# Altium PCB _Mainboard 1.1.PcbDoc (part 1 of 2)
Units mm, origin at the board's own origin, x right, y up, seen from the top; angles counter-clockwise.
Board outline 140.34 x 91.44 mm, 2 copper layers (Top Layer, Bottom Layer); 105 components, 51 nets, 343 pads, 208 vias.
Unrouted connection lines stored in the file: 1.
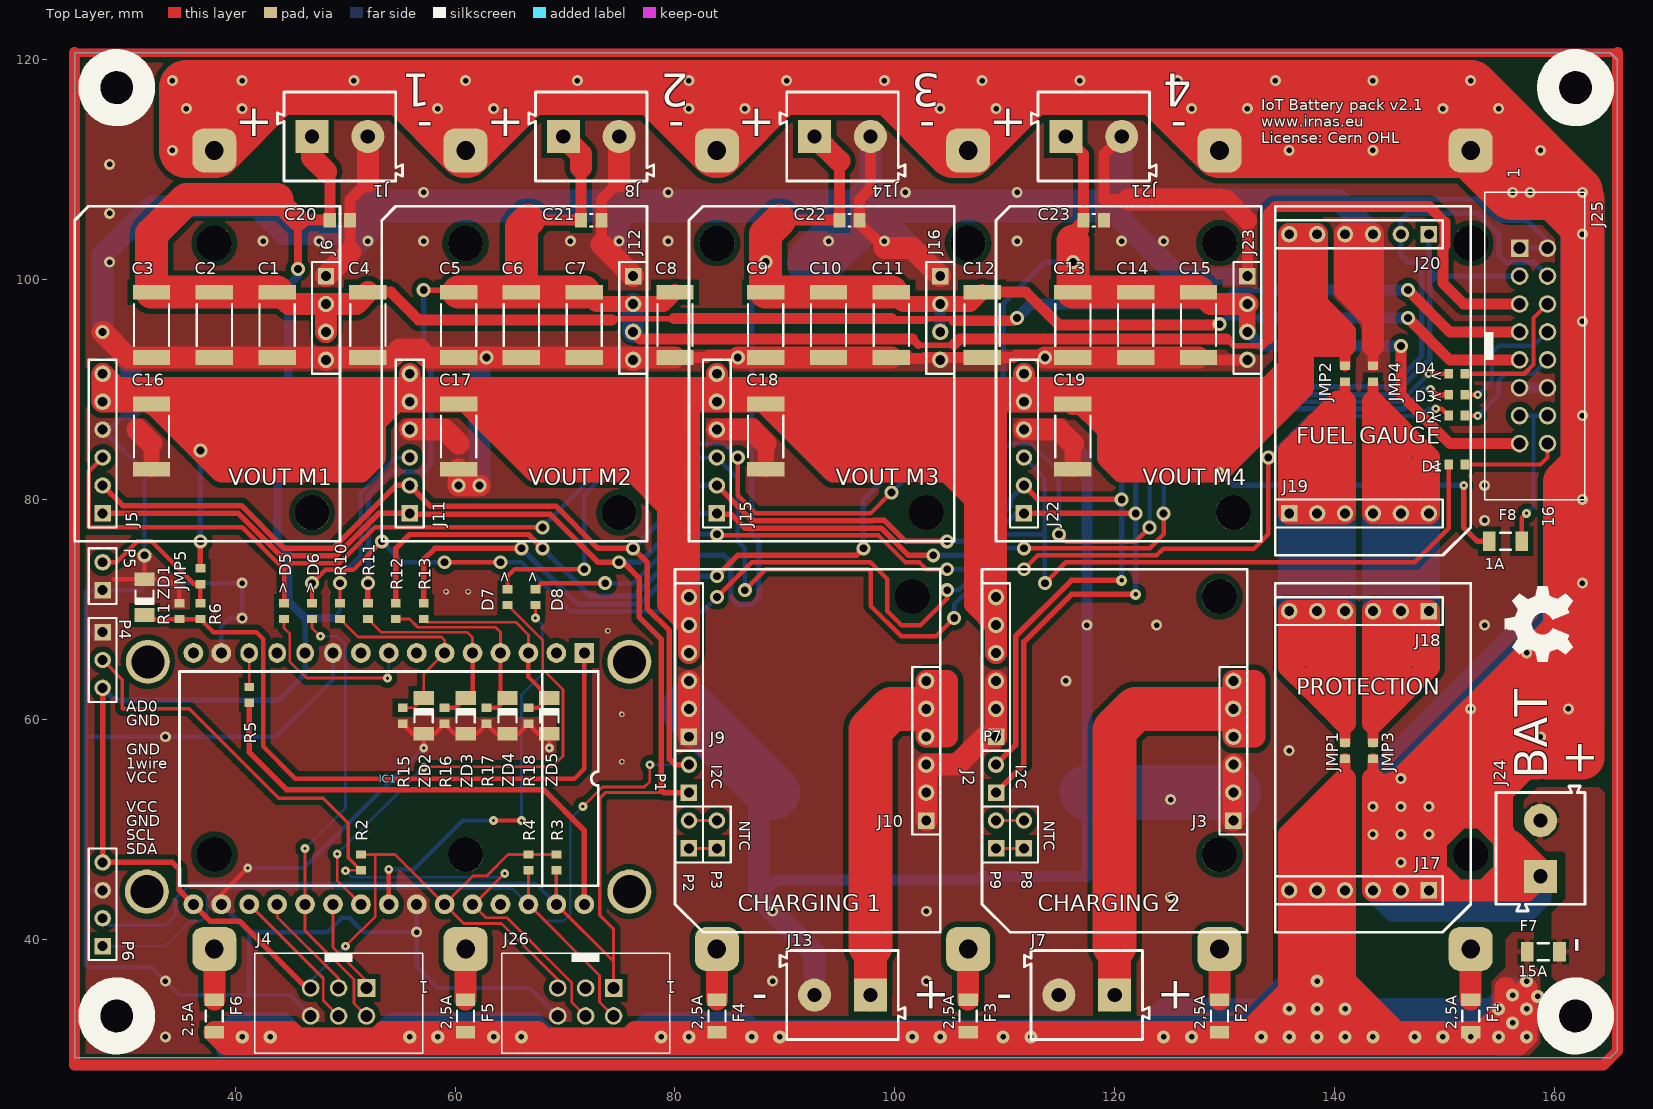
[diagram p0: Top Layer view]
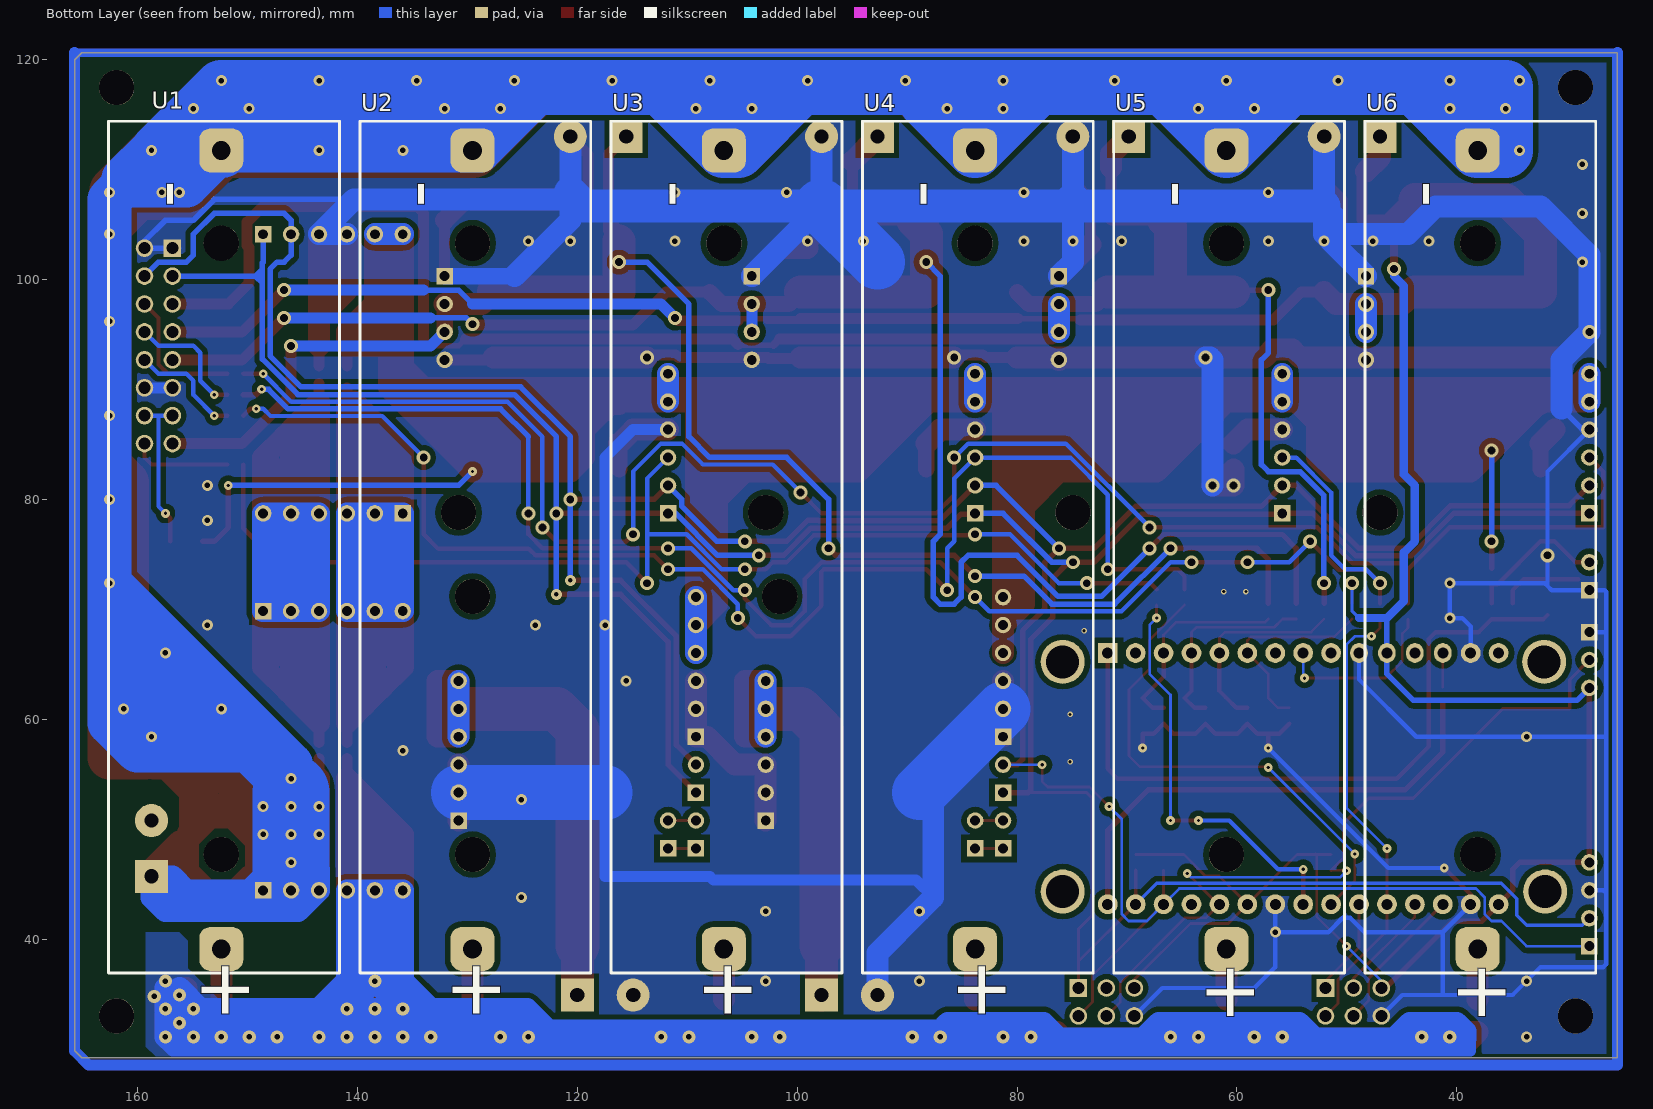
[diagram p1: Bottom Layer view, seen from below]
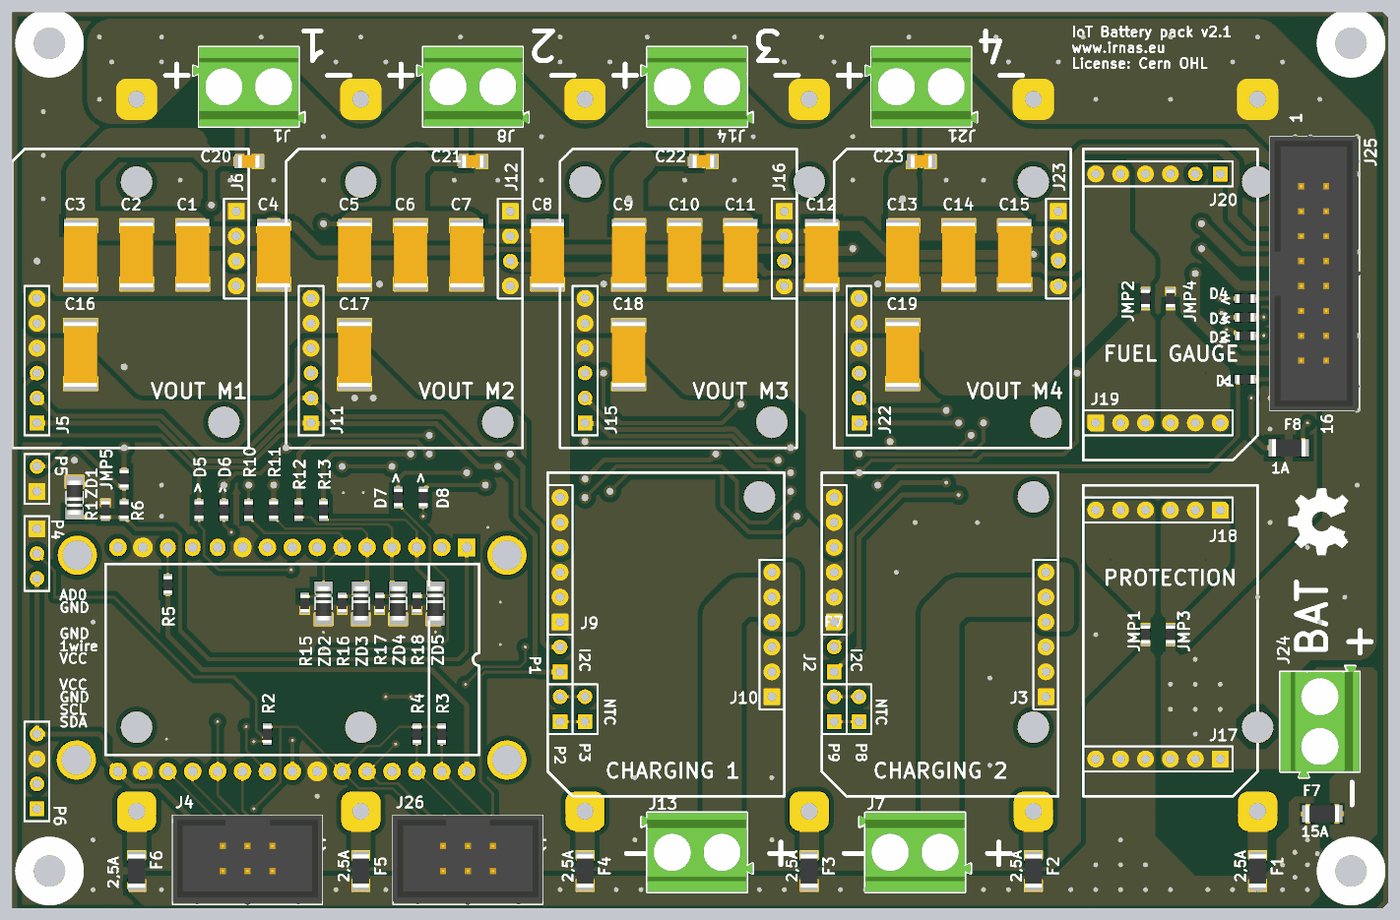
[diagram p3: 3D render of the assembled board from above, using the file's embedded part models]

## Layer stack, top to bottom
Top Solder: solder mask 0.0102, Solder Resist, Dk 3.5
Top Layer: signal copper 0.0356
Dielectric 1: dielectric 0.32, FR-4, Dk 4.8
Bottom Layer: signal copper 0.0356
Bottom Solder: solder mask 0.0102, Solder Resist, Dk 3.5

## Board outline
25.4,29.21 25.4,120.65 165.1,120.65 165.735,120.015 165.735,29.845 165.1,29.21

## Design rules (kind name [scope] priority, off if disabled: settings)
Clearance Clearance_polygon [InNamedPolygon('GND')] p1: gap=0.5 ignorepadtopadclearanceinfootprint=FALSE
Clearance [All] p2: gap=0.2 ignorepadtopadclearanceinfootprint=FALSE
ComponentClearance [All] p1 off: gap=0.254 collisioncheckmode=3 verticalgap=0.254 showdistances=FALSE
Height [All] p1: minheight=0 maxheight=30 prefheight=0
HoleSize [All] p1: absolutevalues=TRUE maxlimit=5 minlimit=0.025 maxpercent=80.000 minpercent=20.000
PlaneConnect [All] p1: planeconnectstyle=Relief reliefexpansion=0.508 reliefentries=4 reliefconductorwidth=0.5 reliefairgap=0.254
PolygonConnect PolygonConnect_gnd [InNet('GND')] p1: connectstyle=Direct reliefconductorwidth=0.5 reliefentries=4 polygonreliefangle="90 Angle" airgapwidth=0.254
PolygonConnect [All] p2: thpad.connectstyle=Relief thpad.reliefconductorwidth=0.5 thpad.reliefentries=4 thpad.polygonreliefangle="90 Angle" thpad.airgapwidth=0.254 smdpad.connectstyle=Relief smdpad.reliefconductorwidth=0.5 smdpad.reliefentries=4 smdpad.polygonreliefangle="90 Angle" smdpad.airgapwidth=0.254 via.connectstyle=Direct via.reliefconductorwidth=0.254 via.reliefentries=4 via.polygonreliefangle="90 Angle" via.airgapwidth=0.254
RoutingVias [All] p1: holewidth=0.4 width=0.8 viastyle="Through Hole" minholewidth=0.3 minwidth=0.6 maxholewidth=1.5 maxwidth=3
SilkToSilkClearance [All] p1 off: silktosilkclearance=0.254
SilkToSolderMaskClearance [IsPad] p1: minsilkscreentomaskgap=0.1 clearancetoexposedcopper=TRUE
SolderMaskExpansion [All] p1: expansion=0.102
Width [All] p1: maxlimit=10 minlimit=0.2 preferedwidth=0.3 minimp=50.000000 maximp=50.000000 favimp=50.000000
24 further rules are at their usual default settings.

## Classes and differential pairs
component class NodemcuShield_Light_Temp_LCD: D5 D6 D7 D8 IC1 J4 J26 JMP5 P4 P5 P6 R1 R2 R3 R4 R5 R6 R7 R8 R9 R10 R11 R12 R13 R14 R15 R16 R17 R18 ZD1 ZD2 ZD3 ZD4 ZD5
component class _Mainboard: D1 D2 D3 D4 F1 F2 F3 F4 F5 F6 F7 F8 F? J1 J2 J3 J5 J6 J7 J8 J9 J10 J11 J12 J13 J14 J15 J16 J17 J18 J19 J20 J21 J22 J23 J24 J25 JMP1 JMP2 JMP3 JMP4 JMP? P1 P2 P3 P7 P8 P9 U1 U2 U3 U4 U5 U6
component class Main_capacitors: C1 C2 C3 C4 C5 C6 C7 C8 C9 C10 C11 C12 C13 C14 C15 C16 C17 C18 C19 C20 C21 C22 C23 C?

## Components (designator, comment, footprint, x,y, rotation, side; value= is the part's Value field where it differs from the comment)
C1 "" "2512 CAP" 43.815,95.885 r90 top
C2 "" "2512 CAP" 38.1,95.885 r90 top
C3 "" "2512 CAP" 32.385,95.885 r90 top
C4 "" "2512 CAP" 52.07,95.885 r90 top
C5 "" "2512 CAP" 60.325,95.885 r90 top
C6 "" "2512 CAP" 66.04,95.885 r90 top
C7 "" "2512 CAP" 71.755,95.885 r90 top
C8 "" "2512 CAP" 80.01,95.885 r90 top
C9 "" "2512 CAP" 88.265,95.885 r90 top
C10 "" "2512 CAP" 93.98,95.885 r90 top
C11 "" "2512 CAP" 99.695,95.885 r90 top
C12 "" "2512 CAP" 107.95,95.885 r90 top
C13 "Capacitor" "2512 CAP" 116.205,95.885 r90 top
C14 "Capacitor" "2512 CAP" 121.92,95.885 r90 top
C15 "Capacitor" "2512 CAP" 127.635,95.885 r90 top
C16 "" "2512 CAP" 32.385,85.725 r90 top
C17 "" "2512 CAP" 60.325,85.725 r90 top
C18 "" "2512 CAP" 88.265,85.725 r90 top
C19 "" "2512 CAP" 116.205,85.725 r90 top
C20 "" "0805 CAP" 49.53,105.41 r180 top
C21 "" "0805 CAP" 72.39,105.41 r180 top
C22 "" "0805 CAP" 95.885,105.41 r180 top
C23 "Capacitor" "0805 CAP" 118.11,105.41 r180 top
D1 "Schottky SOD523" "0603 RES" 151.13,83.185 r180 top
D2 "Schottky SOD523" "0603 RES" 151.13,87.63 r180 top
D3 "Schottky SOD523" "0603 RES" 151.13,89.535 r180 top
D4 "Schottky SOD523" "0603 RES" 151.13,91.44 r180 top
D5 "Schottky SOD523" "0603 RES" 44.45,69.85 r270 top
D6 "Schottky SOD523" "0603 RES" 46.99,69.85 r270 top
D7 "Schottky SOD523" "0603 RES" 64.77,71.12 r270 top
D8 "Schottky SOD523" "0603 RES" 67.31,71.12 r270 top
F1 "SMD fuse" "1206 RES" 152.4,33.02 r90 top
F2 "SMD fuse" "1206 RES" 129.54,33.02 r90 top
F3 "SMD fuse" "1206 RES" 106.68,33.02 r90 top
F4 "SMD fuse" "1206 RES" 83.82,33.02 r90 top
F5 "SMD fuse" "1206 RES" 60.96,33.02 r90 top
F6 "SMD fuse" "1206 RES" 38.1,33.02 r90 top
F7 "SMD fuse" "1206 RES" 159.004,38.862 r180 top
F8 "SMD Fuse" "1206 RES" 155.575,76.2 r180 top
IC1 "NodeMCU_v1" Nodemcu 75.855,65.24 r270 top
J1 "1" 691213510002 49.53,113.03 r0 top locked
J2 "1_ChgA" HDR1X6 109.22,58.42 r90 top
J3 "2_ChgA" HDR1X6 130.81,50.8 r90 top
J4 "61200621621" 61200621621 49.403,34.29 r180 top
J5 "1_Uin" HDR1X6 27.94,78.74 r90 top
J6 "1_Uout" HDR1X4 48.26,100.33 r270 top
J7 "5V" 691213510002 117.475,34.925 r180 top locked
J8 "2" 691213510002 72.39,113.03 r0 top locked
J9 "1_ChgB" HDR1X6 81.28,58.42 r90 top
J10 "2_ChgB" HDR1X6 102.87,50.8 r90 top
J11 "2_Uin" HDR1X6 55.88,78.74 r90 top
J12 "2_Uout" HDR1X4 76.2,100.33 r270 top
J13 "Solar" 691213510002 95.25,34.925 r180 top locked
J14 "3" 691213510002 95.25,113.03 r0 top locked
J15 "3_Uin" HDR1X6 83.82,78.74 r90 top
J16 "3_Uout" HDR1X4 104.14,100.33 r270 top
J17 "Protect_IN" HDR1X6 148.59,44.45 r180 top
J18 "Protect_OUT" HDR1X6 148.59,69.85 r180 top
J19 "Fuel Gauge IN" HDR1X6 135.89,78.74 r0 top
J20 "Fuel Gauge OUT" HDR1X6 148.59,104.14 r180 top
J21 "4" 691213510002 118.11,113.03 r0 top
J22 "4_Uin" HDR1X6 111.76,78.74 r90 top
J23 "4_Uout" HDR1X4 132.08,100.33 r270 top
J24 "AKU" 691213510002 158.75,48.26 r90 top
J25 "Power" 61201621621 158.115,93.98 r270 top locked
J26 "61200621621" 61200621621 71.882,34.29 r180 top
JMP1 "Resistor generic" "0603 RES" 140.97,57.15 r90 top
JMP2 "Resistor generic" "0603 RES" 140.97,91.44 r90 top
JMP3 "Resistor generic" "0603 RES" 143.51,57.15 r90 top
JMP4 "Resistor generic" "0603 RES" 143.51,91.44 r90 top
JMP5 "Resistor generic" "0603 RES" 36.83,73.025 r90 top
P1 "I2C chg" HDR1X2 81.28,53.34 r90 top
P2 "TMP chg1" HDR1X2 81.28,48.26 r90 top
P3 "TMP chg2" HDR1X2 83.82,48.26 r90 top
P4 "Header 3" HDR1X3 27.94,67.945 r270 top
P5 "ADCext" HDR1X2 27.94,71.755 r90 top
P6 "Header 4" HDR1X4 27.94,39.37 r90 top
P7 "I2C chg" HDR1X2 109.22,53.34 r90 top
P8 "TMP chg3" HDR1X2 111.76,48.26 r90 top
P9 "TMP chg4" HDR1X2 109.22,48.26 r90 top
R1 "100k" "0603 RES" 34.925,69.85 r90 top
R2 "3k9" "0603 RES" 51.435,46.99 r90 top
R3 "4k7" "0603 RES" 69.215,46.99 r90 top
R4 "4k7" "0603 RES" 66.675,46.99 r90 top
R5 "0r" "0603 RES" 41.275,62.23 r270 top
R6 "100k" "0603 RES" 36.83,69.85 r90 top
R10 "100k" "0603 RES" 49.53,69.85 r270 top
R11 "100k" "0603 RES" 52.07,69.85 r270 top
R12 "100k" "0603 RES" 54.61,69.85 r270 top
R13 "1M" "0603 RES" 57.15,69.85 r270 top
R15 "100k" "0603 RES" 55.245,60.325 r270 top
R16 "100k" "0603 RES" 59.055,60.325 r270 top
R17 "100k" "0603 RES" 62.865,60.325 r270 top
R18 "100k" "0603 RES" 66.675,60.325 r270 top
U1 "JT-BH-18650" "18650 holder" 152.654,75.422 r90 bottom
U2 "JT-BH-18650" "18650 holder" 129.794,75.422 r90 bottom
U3 "JT-BH-18650" "18650 holder" 106.934,75.422 r90 bottom
U4 "JT-BH-18650" "18650 holder" 84.074,75.422 r90 bottom
U5 "JT-BH-18650" "18650 holder" 61.214,75.422 r90 bottom
U6 "JT-BH-18650" "18650 holder" 38.354,75.422 r90 bottom
ZD1 "Diode Zener" MELF_diode 31.75,71.12 r270 top
ZD2 "Diode Zener" MELF_diode 57.15,60.325 r90 top
ZD3 "Diode Zener" MELF_diode 60.96,60.325 r90 top
ZD4 "Diode Zener" MELF_diode 64.77,60.325 r90 top
ZD5 "Diode Zener" MELF_diode 68.58,60.325 r90 top

## Footprints (in the part's own frame and the unit in brackets; to place one, negate y for a bottom-side part, rotate by r counter-clockwise, add the part's x,y. Pads: shape width x height; smd on the part's side, far side on the other; paste and mask are expansions set on the pad)
"0603 RES" [mm] "RES0603 medium"
  rect 0.75x0.9 smd: 1(-0.725,0) 2(0.725,0)
  body extent -0.87,-0.45 0.87,0.45, height 0.4
"0805 CAP" [mm] "0805 cap"
  rect 1.1x1.35 smd: 1(-0.925,0) 2(0.925,0)
  silkscreen extent -0.1,-0.58 0.1,0.58, body extent -1.1,-0.65 1.1,0.65, height 0.8
"1206 RES" [mm] "RES1206 med"
  rect 1.15x1.75 smd: 1(-1.475,0) 2(1.475,0)
  silkscreen extent -0.5,-0.77 0.5,0.77, body extent -1.7,-0.87 1.7,0.87, height 0.55
"2512 CAP" [mm] "2512 CAP med"
  rect 1.35x3.4 smd: 1(-2.975,0) 2(2.975,0)
  silkscreen extent -1.9,-1.6 1.9,1.6, body extent -3.3,-1.7 3.3,1.7, height 3
"18650 holder" [mm]
  rrect50% 4x4 hole 1.7: 1(-36.306,-0.254) 2(36.338,-0.254)
  silkscreen extent -38.5,-11 39,10
61200621621 [mm] "6 pins, straight, gold plating"
  rect 1.6x1.6 hole 1.1: 1(-2.54,-1.27)
  round 1.6 hole 1.1: 2(-2.54,1.27) 3(0,-1.27) 4(0,1.27) 5(2.54,-1.27) 6(2.54,1.27)
  silkscreen extent -7.64,-4.43 7.64,4.68, body extent -7.64,-4.42 7.64,4.75, height 9.13
61201621621 [mm] "16 pins, straight, gold plating"
  rect 1.6x1.6 hole 1.1: 1(-8.89,-1.27)
  round 1.6 hole 1.1: 2(-8.89,1.27) 3(-6.35,-1.27) 4(-6.35,1.27) 5(-3.81,-1.27) 6(-3.81,1.27) 7(-1.27,-1.27) 8(-1.27,1.27) 9(1.27,-1.27) 10(1.27,1.27) 11(3.81,-1.27) 12(3.81,1.27) 13(6.35,-1.27) 14(6.35,1.27) 15(8.89,-1.27) 16(8.89,1.27)
  silkscreen extent -13.99,-4.42 13.99,4.68, body extent -13.99,-4.42 13.99,4.75, height 9.13
691213510002 [mm] "Serie 2135 - 5.08 mm _ 2 pins"
  rect 3x3 hole 1.3: 1(-2.54,0)
  round 3 hole 1.3: 2(2.54,0)
  silkscreen extent -5.68,-4.05 5.68,4.05, body extent -5.68,-4.05 5.68,4.05, height 10.1
HDR1X2 [mm] "Connector; Header; 2 Position"
  rect 1.5x1.5 hole 0.9: 1(0,0)
  round 1.5 hole 0.9: 2(2.54,0)
  silkscreen extent -1.27,-1.27 3.81,1.27
HDR1X3 [mm] "Connector; Header; 3 Position"
  rect 1.5x1.5 hole 0.9: 1(0,0)
  round 1.5 hole 0.9: 2(2.54,0) 3(5.08,0)
  silkscreen extent -1.27,-1.27 6.35,1.27
HDR1X4 [mm] "Connector; Header; 4 Position"
  rect 1.5x1.5 hole 0.9: 1(0,0)
  round 1.5 hole 0.9: 2(2.54,0) 3(5.08,0) 4(7.62,0)
  silkscreen extent -1.27,-1.27 8.89,1.27
HDR1X6 [mm] "Connector; Header; 6 Position"
  rect 1.5x1.5 hole 0.9: 1(0,0)
  round 1.5 hole 0.9: 2(2.54,0) 3(5.08,0) 4(7.62,0) 5(10.16,0) 6(12.7,0)
  silkscreen extent -1.27,-1.27 13.97,1.27
MELF_diode [mm] "MELF Diode, 2-Leads, Body 3,50x1,65mm, IPC Medium Density"
  rect 1.25x1.85 smd: 1(-1.625,0) 2(1.625,0)
  silkscreen extent -0.6,-0.83 0.6,0.82, body extent -1.75,-0.82 1.75,0.82, height 1.65
Nodemcu [mm]
  rect 1.8x1.8 hole 1: 1(-0.8,-4.1)
  round 1.8 hole 1: 2(-0.8,-6.64) 3(-0.8,-9.18) 4(-0.8,-11.72) 5(-0.8,-14.26) 6(-0.8,-16.8) 7(-0.8,-19.34) 8(-0.8,-21.88) 9(-0.8,-24.42) 14(-0.8,-37.12) 15(-0.8,-39.66) 16(22.06,-39.66) 17(22.06,-37.12) 18(22.06,-34.58) 19(22.06,-32.04) 20(22.06,-29.5) 21(22.06,-26.96) 22(22.06,-24.42) 23(22.06,-21.88) 24(22.06,-19.34) 25(22.06,-16.8) 26(22.06,-14.26) 27(22.06,-11.72) 28(22.06,-9.18) 29(22.06,-6.64) 30(22.06,-4.1)
  oval 1.8x1.6 hole 1: 10(-0.8,-26.96) 11(-0.8,-29.5) 12(-0.8,-32.04) 13(-0.8,-34.58)
  round 4 hole 3: 31(0,0) 31(0,-43.8) 31(20.9,0) 31(20.9,-43.9)
  silkscreen extent 0.89,-40.93 20.4,-2.83

## Part data
C1 C2 C3 C4 C5 C6 C7 C8 C9 C10 C11 C12 C16 C17 C18: library part "Capacitor NP", "Capacitor", Voltage=10V, Valve=47uF
C13 C14 C15: library part "Capacitor NP", Voltage=25V, Valve=22uF
C19 C20 C21 C22: library part "Capacitor NP", "Capacitor", Voltage=50V, Valve=100nF
C23: library part "Capacitor NP", Voltage=50V, Valve=100nF
D1 D2 D3 D4 D5 D6 D7 D8 F1 F2 F3 F4 F5 F6: library part Resistor
  F1 F2 F3 F4 F5 F6: Valve=2A
F7: library part Resistor, "Farnell  1832127", Code="Littlefuse 1206SFH200F/24-2", Farnell=1832127, Valve="20A fast"
F8: library part Resistor, "SMD fuse", Valve=2A
IC1: "nodemcu"
J1 J7 J8 J13 J14 J21 J24: library part 691213510002, "2P 5.08 screw terminal", ComponentLink1Description=Manufacturer, ComponentLink1URL=http://www.we-online.de, ComponentLink2Description=Datasheet, ComponentLink2URL=http://katalog.we-online.de/em/datasheet/6912135100XX.pdf, Part Number=691213510002, Pin Number=2, Pitch="5.08 mm", Published Date="March 2017", Publisher="Wurth Elektronik"
J2 J3 J5 J9 J10 J11 J15 J17 J18 J19 J20 J22: library part "Header 6", "Header, 6-Pin"
J4 J26: "WR-BHD 2.54mm Male Box Header", Manufacturer="Wurth Elektronik", ComponentLink1 Description=Manufacturer, ComponentLink1URL=http://www.we-online.com, ComponentLink2 Description=Datasheet, ComponentLink2URL=http://katalog.we-online.de/em/datasheet/6120xx21621.pdf, Created by="Baojun Chen", Created Date="March 2016", NoPins=6, partNo=61200621621
J6 J12 J16 J23: library part "Header 4", "Header, 4-Pin", LatestRevisionDate=17-Jul-2002, LatestRevisionNote="Re-released for DXP Platform.", Publisher="Altium Limited"
J25: library part 61201621621, "WR-BHD 2.54mm Male Box Header", Manufacturer="Wurth Elektronik", ComponentLink1 Description=Manufacturer, ComponentLink1URL=http://www.we-online.com, ComponentLink2 Description=Datasheet, ComponentLink2URL=http://katalog.we-online.de/em/datasheet/6120xx21621.pdf, Created by="Baojun Chen", Created Date="March 2016", NoPins=16, partNo=61201621621
JMP1 JMP2 JMP3 JMP4 JMP5: library part Resistor, "Resistor SMD"
P1 P2 P3 P5 P7 P8 P9: library part "Header 2", "Header, 2-Pin", LatestRevisionDate=17-Jul-2002, LatestRevisionNote="Re-released for DXP Platform.", Publisher="Altium Limited"
P4: "Header, 3-Pin", LatestRevisionDate=17-Jul-2002, LatestRevisionNote="Re-released for DXP Platform.", Publisher="Altium Limited"
P6: "Header, 4-Pin", LatestRevisionDate=17-Jul-2002, LatestRevisionNote="Re-released for DXP Platform.", Publisher="Altium Limited"
R1 R2 R3 R4 R5 R6: library part Resistor, "Resistor 0603"
R10 R11 R12 R13 R15 R16 R17 R18: library part Resistor, "Resistor 0805 smd"
U1 U2 U3 U4 U5 U6: library part "18650 holder", Producer=http://jiatelcn.com
ZD1 ZD2 ZD3 ZD4 ZD5: "Zener", Valve=3V6

## Free pads (board coordinates)
  round 3.2 hole 3.2: 3(161.925,117.475) 4(29.21,117.475) 5(29.21,33.02) 6(161.925,33.02) 7(38.1,47.693) 7(38.1,103.319) 7(46.99,78.808) 7(60.96,47.693) 7(60.96,103.319) 7(74.93,78.808) 7(83.82,103.319) 7(101.6,71.188) 7(102.87,78.808) 7(106.68,103.319) 7(129.54,47.693) 7(129.54,71.188) 7(129.54,103.319) 7(130.81,78.808) 7(152.4,47.693) 7(152.4,103.319)

## Via types
v1: diameter 1, hole 0.5, Top Layer to Bottom Layer, tented both sides, 88 vias
v2: diameter 1.27, hole 0.711, Top Layer to Bottom Layer, tented both sides, 52 vias
v3: diameter 1.2, hole 0.5, Top Layer to Bottom Layer, tented both sides, 36 vias
v4: diameter 0.8, hole 0.3, Top Layer to Bottom Layer, tented both sides, 25 vias
v5: diameter 0.5, hole 0.3, Top Layer to Bottom Layer, tented both sides, 5 vias
v6: diameter 1, hole 0.4, Top Layer to Bottom Layer, tented both sides, 2 vias

## Nets (pads, with @x,y where several pads share a name; then routed paths per layer and width w, separated by ;. In a path a pad name is that pad's centre, name@x,y a point inside that pad or via, vN(x,y) a via of type N, cw(c..) or ccw(c..) an arc to the next point about the centre after c; other vN are vias at no path point)
1w: IC1.26 J26.4 P4.2 R2.1 | length 70.7
  Top Layer w0.25: v4(50.038,46.228) 50.075,46.265 R2.1@51.435,46.265 ; v4(64.516,45.974) 61.722,43.18 IC1.26@61.595,43.18 62.82,41.955 64.724,41.955 70.612,36.067 70.612,34.29 J26.4@71.882,33.02
  Top Layer w0.3: P4.2@27.94,65.405 29.718,63.627 29.718,60.96 35.814,60.96 43.942,52.832 48.006,52.832 50.292,50.546 50.292,47.408 R2.1@51.435,46.265
  Bottom Layer w0.25: v4(50.038,46.228) 50.636,45.63 64.172,45.63 v4(64.516,45.974)
+BATT: F1.1 F2.1 F3.1 F4.1 F5.1 F6.1 F7.2 J17.4 J17.5 J17.6 JMP1.1 | length 866.7
  Top Layer w1: 140.97,54.61 JMP1.1@140.97,56.425
  Top Layer w2: 155.575,35.56 155.575,33.655 153.465,31.545 F1.1@152.4,31.545 145.62,31.545 ; 157.48,33.02 v3(157.48,31.115) 156.845,30.48 154.305,30.48 ; 157.48,35.56 v3(157.48,33.655) v3(154.94,31.115) 154.305,30.48 ; 132.08,31.545 135.255,31.545 ; 132.08,31.545 F2.1@129.54,31.545 F3.1@106.68,31.545 F4.1@83.82,31.545 76.36,31.545 75.781,30.966 68.094,30.966 67.515,31.545 F5.1@60.96,31.545 53.5,31.545 52.921,30.966 45.671,30.966 45.092,31.545 F6.1@38.1,31.545 39.165,30.48 146.685,30.48 ; 132.08,31.545 134.405,33.87 ; 134.405,33.87 135.89,35.355 ; 134.405,33.87 134.405,32.395 135.255,31.545 ; 135.255,31.545 137.16,31.545 ; 135.255,31.545 135.89,32.18 v3(135.89,33.655) 135.89,35.355 ; 135.89,35.355 137.16,36.625 ; 135.89,35.355 J17.6@135.89,44.45 ; J17.6@135.89,44.45 J17.5@138.43,44.45 ; J17.6@135.89,44.45 137.16,45.72 ; J17.6@135.89,44.45 137.16,43.18 137.16,36.625 ; J17.6@135.89,44.45 135.89,45.72 ; 135.89,45.72 137.16,46.99 ; 135.89,45.72 137.16,45.72 ; 135.89,45.72 135.89,48.26 ; 135.89,48.26 137.16,49.53 ; 135.89,48.26 135.89,49.53 140.97,54.61 140.97,53.34 ; 137.16,31.545 v3@138.43,31.545 ; 137.16,31.545 137.16,36.625 ; 137.16,45.72 J17.5@138.43,44.45 ; 137.16,45.72 137.16,46.99 ; 137.16,46.99 137.16,49.53 ; 137.16,46.99 138.43,48.26 ; 137.16,49.53 140.97,53.34 ; v3@138.43,31.545 139.7,31.545 ; v3@138.43,31.545 v3(138.43,33.655) v3(138.43,36.195) J17.5@138.43,44.45 ; J17.5@138.43,44.45 139.7,43.18 139.7,31.545 ; J17.5@138.43,44.45 138.43,48.26 ; J17.5@138.43,44.45 J17.4@140.97,44.45 ; 138.43,48.26 139.382,49.212 ; 139.382,49.212 139.7,48.895 139.7,45.72 J17.4@140.97,44.45 ; 139.382,49.212 140.97,50.8 ; 139.7,31.545 v3@140.97,31.545 ; v3@140.97,31.545 v3(140.97,33.655) 140.97,36.195 ; v3@140.97,31.545 v3@143.51,31.545 ; 140.97,36.195 J17.4@140.97,44.45 ; 140.97,36.195 142.24,34.925 ; J17.4@140.97,44.45 140.97,50.8 ; 140.97,50.8 140.97,53.34 ; 142.24,34.925 144.78,32.385 ; 142.24,34.925 142.24,32.815 v3@143.51,31.545 ; v3@143.51,31.545 144.78,31.545 ; 144.78,31.545 145.62,31.545 ; 144.78,31.545 144.78,32.385 ; 144.78,32.385 145.62,31.545 ; 145.62,31.545 146.685,30.48 ; 146.685,30.48 154.305,30.48
  Bottom Layer w1: 39.221,31.601 38.735,31.115 38.735,29.845 156.845,29.845 157.48,30.48 v3(157.48,31.115)
  Bottom Layer w2: v3(154.94,33.655) 156.21,33.655 ; v3(156.21,34.925) 156.21,33.655 ; 156.21,35.56 154.305,33.655 143.51,33.655 ; 157.48,35.56 157.48,34.925 ; 39.37,31.75 40.005,32.385 44.252,32.385 45.671,30.966 ; 39.37,31.75 40.005,31.115 v3(40.64,31.115) v3@40.789,30.966 ; 39.37,31.75 39.221,31.601 39.221,30.966 v3@40.789,30.966 ; v3@40.789,30.966 45.671,30.966 ; 45.671,30.966 52.921,30.966 ; 52.921,30.966 68.531,30.966 ; 52.921,30.966 54.34,32.385 67.112,32.385 68.531,30.966 ; 68.531,30.966 76.2,30.966 ; 76.2,30.966 121.92,30.966 ; 76.2,30.966 77.619,32.385 86.285,32.385 86.995,31.675 122.63,31.675 ; 121.92,30.966 122.63,31.675 ; 121.92,30.966 v3@124.311,30.966 ; 122.63,31.675 123.9,32.945 ; 122.63,31.675 123.9,31.675 ; 123.9,31.675 v3(124.46,31.115) v3@124.311,30.966 ; 123.9,31.675 123.9,32.945 ; 123.9,32.945 124.46,32.385 157.48,32.385 ; 123.9,32.945 124.609,33.655 133.35,33.655 ; v3@124.311,30.966 157.331,30.966 v3(157.48,31.115) 157.48,32.385 ; 133.35,33.655 v3(135.89,33.655) ; 133.35,33.655 135.89,36.195 ; v3(135.89,33.655) 137.16,33.655 ; v3(135.89,33.655) 135.89,36.195 ; v3(135.89,33.655) 137.16,34.925 ; 135.89,36.195 J17.6@135.89,44.45 137.16,44.45 ; 137.16,33.655 v3(138.43,33.655) v3(140.97,33.655) ; 137.16,33.655 137.16,34.925 ; 137.16,34.925 v3(138.43,36.195) ; 137.16,34.925 137.16,44.45 ; 137.16,44.45 J17.5@138.43,44.45 ; v3(138.43,36.195) 139.7,34.925 ; v3(138.43,36.195) J17.5@138.43,44.45 ; J17.5@138.43,44.45 139.7,44.45 ; 139.7,34.925 139.7,44.45 ; 139.7,34.925 v3(140.97,33.655) ; 139.7,44.45 J17.4@140.97,44.45 140.97,36.195 ; v3(140.97,33.655) 143.51,33.655 ; v3(140.97,33.655) 140.97,36.195 ; 140.97,36.195 143.51,33.655 ; 156.21,33.655 v3(157.48,33.655) ; 156.21,33.655 157.48,34.925 ; 157.48,32.385 v3(157.48,33.655) ; v3(157.48,33.655) 157.48,34.925
  other v3: 43.18,31.115 55.88,31.115 58.42,31.115 63.5,31.115 66.04,31.115 78.74,31.115 81.28,31.115 86.995,31.115 89.535,31.115 101.6,31.115 104.14,31.115 109.855,31.115 112.395,31.115 127,31.115 133.35,31.115 135.89,31.115 138.43,31.115 140.97,31.115 143.51,31.115 147.32,31.115 149.86,31.115 152.4,31.115 156.21,32.385 158.496,34.798 157.48,36.195
+VBAT: C16.2 C17.2 C18.2 C19.2 F8.2 J2.4 J2.5 J2.6 J5.5 J5.6 J9.4 J9.5 J9.6 J11.5 J11.6 J15.5 J15.6 J20.5 J20.6 J22.5 J22.6 JMP2.2 JMP5.2 | length 732.6
  Top Layer w0.5: JMP5.2@36.83,73.75 v2(36.83,76.2) ; v4(151.765,81.28) 151.765,77.47 153.035,76.2 F8.2@154.1,76.2
  Top Layer w1: JMP2.2@140.97,92.165 140.97,93.98
  Top Layer w2: C16.2@32.385,88.7 32.585,88.7 34.29,86.995 ; 51.435,85.09 36.195,85.09 ; J11.6@55.88,91.44 55.88,90.17 ; J9.4@81.28,66.04 J9.5@81.28,68.58 ; J15.6@83.82,91.44 83.82,90.17 ; C18.2@88.265,88.7 94.415,82.55 95.885,82.55 ; 104.14,82.55 95.885,82.55 ; 107.315,79.375 107.315,70.485 J2.5@109.22,68.58 ; J2.4@109.22,66.04 J2.5@109.22,68.58 ; J22.6@111.76,91.44 111.76,90.17 ; C19.2@116.205,88.7 117.04,88.7 118.745,86.995 ; 34.29,86.995 52.705,86.995 ; 34.29,86.995 36.195,85.09 ; 36.195,85.09 v2(36.83,84.455) 37.465,83.82 ; 37.465,83.82 52.705,83.82 ; 37.465,83.82 38.735,82.55 51.435,82.55 52.705,83.82 ; 52.705,83.82 52.705,86.995 ; 52.705,86.995 54.61,88.9 ; 54.61,88.9 J11.5@55.88,88.9 ; 54.61,88.9 J5.5@27.94,88.9 J5.6@27.94,91.44 29.21,90.17 55.88,90.17 ; J11.5@55.88,88.9 55.88,90.17 ; J11.5@55.88,88.9 C17.2@60.96,88.9 ; 55.88,90.17 83.82,90.17 ; C17.2@60.96,88.9 81.28,88.9 ; C17.2@60.96,88.9 62.865,86.995 ; 62.865,86.995 81.28,86.995 ; 62.865,86.995 64.77,85.09 ; 64.77,85.09 80.645,85.09 81.28,84.455 ; 64.77,85.09 66.358,83.502 ; 66.358,83.502 67.31,84.455 81.28,84.455 ; 66.358,83.502 67.31,82.55 76.2,82.55 ; 76.2,82.55 79.375,79.375 ; 76.2,82.55 79.375,82.55 ; 79.375,79.375 79.375,82.55 ; 79.375,79.375 79.375,70.485 J9.5@81.28,68.58 ; 79.375,82.55 81.28,82.55 ; J9.5@81.28,68.58 J9.6@81.28,71.12 81.28,82.55 ; 81.28,82.55 81.28,84.455 ; 81.28,84.455 81.28,86.995 ; 81.28,86.995 81.28,88.9 ; 81.28,88.9 J15.5@83.82,88.9 ; J15.5@83.82,88.9 83.82,90.17 ; J15.5@83.82,88.9 C18.2@89.535,88.9 ; 83.82,90.17 88.265,90.17 ; 88.265,90.17 C18.2@89.535,88.9 ; 88.265,90.17 111.76,90.17 ; C18.2@89.535,88.9 109.22,88.9 ; C18.2@89.535,88.9 91.44,86.995 ; 91.44,86.995 108.585,86.995 109.22,87.63 ; 91.44,86.995 92.71,85.725 ; 92.71,85.725 109.22,85.725 ; 92.71,85.725 94.297,84.138 ; 94.297,84.138 94.615,84.455 109.22,84.455 ; 94.297,84.138 95.885,82.55 ; 107.315,82.55 107.315,80.01 104.775,82.55 107.315,82.55 ; 107.315,82.55 109.22,82.55 ; J2.5@109.22,68.58 J2.6@109.22,71.12 109.22,82.55 ; 109.22,82.55 109.22,84.455 ; 109.22,84.455 109.22,85.725 ; 109.22,85.725 109.22,87.63 ; 109.22,87.63 109.22,88.9 ; 109.22,88.9 J22.5@111.76,88.9 ; J22.5@111.76,88.9 111.76,90.17 ; J22.5@111.76,88.9 119.38,88.9 ; 111.76,90.17 133.985,90.17 ; 118.745,86.995 119.38,86.36 ; 118.745,86.995 119.38,86.995 ; 119.38,86.36 119.38,83.82 120.65,82.55 123.19,82.55 ; 119.38,86.36 119.38,86.995 ; 119.38,86.36 120.332,85.407 ; 119.38,86.995 119.38,88.9 ; 119.38,86.995 133.985,86.995 ; 119.38,88.9 133.35,88.9 134.62,90.17 ; 120.332,85.407 132.398,85.407 ; 120.332,85.407 121.92,83.82 ; 121.92,83.82 123.19,82.55 ; 121.92,83.82 130.81,83.82 ; 123.19,82.55 v4(129.54,82.55) 130.81,83.82 ; 130.81,83.82 132.398,85.407 ; 132.398,85.407 133.985,86.995 ; 133.985,86.995 137.16,90.17 137.16,93.345 ; 133.985,90.17 135.89,92.075 ; 133.985,90.17 134.62,90.17 ; 134.62,90.17 135.89,91.44 135.89,92.075 ; 135.89,92.075 137.16,93.345 ; 135.89,92.075 J20.6@135.89,104.14 137.16,104.14 ; 137.16,93.345 137.16,94.615 ; 137.16,94.615 137.795,93.98 139.7,93.98 ; 137.16,94.615 137.16,96.52 ; 137.16,94.615 139.065,94.615 139.7,93.98 ; 137.16,96.52 138.43,96.52 140.97,93.98 ; 137.16,96.52 137.16,104.14 ; 137.16,104.14 J20.5@138.43,104.14 138.43,97.79 140.97,95.25 140.97,93.98 ; 139.7,93.98 140.97,93.98
  Bottom Layer w0.5: v2(36.83,76.2) v2(36.83,84.455) ; v4(129.54,82.55) 130.81,81.28 v4(151.765,81.28)
  Bottom Layer w2: J5.5@27.94,88.9 J5.6@27.94,91.44 ; J11.5@55.88,88.9 J11.6@55.88,91.44 ; J15.5@83.82,88.9 J15.6@83.82,91.44 ; J2.4@109.22,66.04 J2.5@109.22,68.58 J2.6@109.22,71.12 ; J22.5@111.76,88.9 J22.6@111.76,91.44 ; J20.6@135.89,104.14 J20.5@138.43,104.14
a0: IC1.1 R1.1 R6.1 ZD1.2 | length 62.8
  Top Layer w0.4: ZD1.2@31.75,69.495 32.12,69.125 R1.1@34.925,69.125 R6.1@36.83,69.125 38.01,67.945 41.91,67.945 42.545,67.31 42.545,57.531 45.466,54.61 70.866,54.61 71.755,55.499 IC1.1@71.755,66.04
en3mc: D7.2 IC1.22 | length 45.5
  Top Layer w0.25: v4(49.276,47.752) 49.276,45.339 IC1.22@51.435,43.18 ; v4(57.15,55.626) 57.207,55.683 68.834,55.683 69.83,56.679 69.83,62.71 67.99,64.55 67.99,67.175 D7.2@64.77,70.395
  Bottom Layer w0.25: v4(49.276,47.752) v4(57.15,55.626)
GND: C1.1 C2.1 C3.1 C4.1 C5.1 C6.1 C7.1 C8.1 C9.1 C10.1 C11.1 C12.1 C13.1 C14.1 C15.1 C16.1 C17.1 C18.1 C19.1 C20.1 C21.1 C22.1 C23.1 IC1.10 IC1.14 IC1.17 IC1.24 J1.2 J2.1 J2.2 J2.3 J3.1 J3.2 J3.3 J4.6 J5.4 J6.1 J6.4 J7.2 J8.2 J9.1 J9.2 J9.3 J10.1 J10.2 J10.3 J11.4 J12.1 J12.4 J13.2 J14.2 J15.4 J16.1 J16.4 J20.3 J20.4 J21.2 J22.4 J23.1 J23.4 J25.1 J25.2 J25.11 J25.12 J26.6 JMP4.2 P4.1 P5.1 P6.3 pad.4 pad.5 R1.2 R15.2 R16.2 R17.2 R18.2 ZD1.1 ZD2.1 ZD3.1 ZD4.1 ZD5.1 | length 865.2
  Top Layer w0.4: 28.93,72.745 ZD1.1@31.75,72.745 ; v2(31.75,74.93) ZD1.1@31.75,72.745 ; R1.2@34.925,70.575 34.925,71.755 33.935,72.745 ZD1.1@31.75,72.745 ; IC1.17@38.735,43.18 38.735,44.069 v4(41.148,46.482) ; R15.2@55.245,59.6 56.145,58.7 ZD2.1@57.15,58.7 58.155,58.7 R16.2@59.055,59.6 59.955,58.7 ZD3.1@60.96,58.7 61.965,58.7 R17.2@62.865,59.6 63.765,58.7 ZD4.1@64.77,58.7 65.775,58.7 R18.2@66.675,59.6 67.575,58.7 ZD5.1@68.58,58.7 v4(68.58,57.404) ; v4(57.15,57.404) ZD2.1@57.15,58.674
  Top Layer w1: 50.455,102.525 50.455,107.315 52.07,108.93 ; 73.315,103.215 73.315,107.315 74.93,108.93 ; C8.1@80.01,92.91 82.886,92.91 83.116,93.14 85.5,93.14 v2(85.725,92.915) ; J14.2@97.79,113.03 97.79,108.295 96.81,107.315 96.81,105.12 99.06,102.87 ; C11.1@99.695,92.91 99.755,92.85 102.662,92.85 102.722,92.91 103.94,92.91 J16.4@104.14,92.71 104.34,92.91 C12.1@107.95,92.91 110.826,92.91 111.056,93.14 113.44,93.14 v2(113.665,92.915) ; J21.2@120.65,113.03 119.035,111.415 119.035,107.315 121.285,107.315 ; C15.1@127.635,92.91 127.835,92.71 J23.4@132.08,92.71 ; 129.54,107.315 130.175,107.315 ; J23.1@132.08,100.33 132.08,105.41 ; JMP4.2@143.51,92.165 143.51,93.98
  Top Layer w1.5: C16.1@32.385,82.75 32.385,85.09 ; C18.1@88.265,82.75 88.265,85.09 ; C19.1@116.205,82.75 116.205,85.09
  Top Layer w1.75: 130.175,107.315 132.08,105.41
  Top Layer w2: v2(27.94,95.25) 30.28,92.91 C3.1@32.385,92.91 C2.1@38.1,92.91 C1.1@43.815,92.91 48.06,92.91 J6.4@48.26,92.71 48.46,92.91 C4.1@52.07,92.91 54.239,92.91 54.969,93.64 56.791,93.64 57.521,92.91 C5.1@60.325,92.91 v2(62.865,92.91) C6.1@66.04,92.91 C7.1@71.755,92.91 76,92.91 J12.4@76.2,92.71 76.4,92.91 C8.1@80.01,92.91 ; 31.115,86.36 32.385,85.09 ; J6.1@48.26,100.33 50.455,102.525 ; 52.07,108.93 J1.2@52.07,113.03 ; J11.4@55.88,86.36 59.055,86.36 60.325,85.09 ; C17.1@60.325,82.75 v2(60.325,81.28) v2(62.23,81.28) ; 73.315,103.215 J12.1@76.2,100.33 ; 74.93,108.93 J8.2@74.93,113.03 ; J9.1@81.28,58.42 J9.2@81.28,60.96 J9.3@81.28,63.5 ; J15.4@83.82,86.36 86.995,86.36 88.265,85.09 ; v2(85.725,92.915) 85.73,92.91 C9.1@88.265,92.91 C10.1@93.98,92.91 C11.1@99.695,92.91 ; 99.06,102.87 101.6,102.87 J16.1@104.14,100.33 ; J10.1@102.87,50.8 J10.2@102.87,53.34 J10.3@102.87,55.88 105.664,55.88 108.204,58.42 J2.1@109.22,58.42 J2.2@109.22,60.96 J2.3@109.22,63.5 ; J22.4@111.76,86.36 114.935,86.36 116.205,85.09 ; v2(113.665,92.915) 113.67,92.91 C13.1@116.205,92.91 C14.1@121.92,92.91 C15.1@127.635,92.91 ; 121.285,107.315 129.54,107.315 ; J3.1@130.81,50.8 J3.2@130.81,53.34 J3.3@130.81,55.88 ; 143.51,93.98 143.51,96.52 ; 141.281,98.749 143.51,96.52 ; 141.281,98.749 140.97,99.06 J20.4@140.97,104.14 142.24,104.14 ; 141.281,98.749 142.24,99.708 142.24,104.14 ; 142.24,104.14 J20.3@143.51,104.14 143.51,96.52
  Bottom Layer w0.4: P6.3@27.94,44.45 26.67,44.45 26.416,44.196 ; P4.1@27.94,67.945 26.543,67.945 26.416,67.818 ; J5.4@27.94,86.36 31.75,82.55 v2(31.75,74.93) 31.75,72.136 ; IC1.17@38.735,43.18 41.275,40.64 ; IC1.14@38.735,66.04 38.735,68.453 39.497,69.215 v1(40.64,69.215) v1(40.64,72.39) 32.004,72.39 31.75,72.136 ; 41.148,34.925 41.275,35.052 41.275,40.64 ; v4(41.148,46.482) 46.228,46.482 v4(57.15,57.404) ; J4.6@46.863,33.02 44.958,34.925 34.925,34.925 v1(33.655,36.195) 32.385,37.465 26.67,37.465 26.416,37.719 26.416,44.196 ; IC1.10@48.895,66.04 48.895,63.627 43.688,58.42 v1(33.655,58.42) 26.416,58.42 ; IC1.24@56.515,43.18 v1(56.515,40.64) ; J26.6@69.342,33.02 66.802,35.56 58.42,35.56 56.515,37.465 v1(56.515,40.64) ; 80.01,59.69 J9.1@81.28,58.42 ; J25.1@156.21,102.87 J25.1@156.845,102.87 ; J25.2@159.385,102.87 J25.2@159.385,103.505 ; 26.416,44.196 26.416,58.42 ; 26.416,58.42 26.416,67.818 ; 26.416,67.818 26.416,71.628 26.543,71.755 P5.1@27.94,71.755 31.369,71.755 31.75,72.136 ; 41.275,40.64 48.399,40.64 49.707,41.948 50.369,41.948 51.677,40.64 v1(56.515,40.64)
  Bottom Layer w0.5: J5.4@27.94,86.36 28.575,86.36 30.48,88.265 ; 140.335,107.315 153.035,107.315 154.94,105.41 157.48,105.41 J25.2@159.385,103.505 ; J25.1@156.845,102.87 J25.2@159.385,102.87
  Bottom Layer w1: 87.63,43.815 89.208,45.393 107.633,45.393 107.96,45.72 117.475,45.72 117.475,53.34 v1(117.475,68.58) 117.475,83.82 114.935,86.36 J22.4@111.76,86.36 ; J25.11@156.845,90.17 J25.12@159.385,90.17
  Bottom Layer w1.5: 125.73,100.33 J23.1@132.08,100.33
  Bottom Layer w2: 30.48,88.265 30.48,92.71 v2(27.94,95.25) 27.94,102.235 32.385,106.68 41.91,106.68 44.45,104.14 51.117,104.14 ; J6.1@48.26,100.33 51.117,103.188 ; J1.2@52.07,113.03 52.07,106.68 ; v2(62.23,81.28) 62.23,92.71 62.43,92.91 v2(62.865,92.91) ; J8.2@74.93,113.03 74.93,107.315 74.93,106.712 74.93,101.6 J12.1@76.2,100.33 ; 88.9,53.34 87.63,52.07 87.63,43.815 v1(88.9,42.545) 92.71,38.735 J13.2@92.71,34.925 ; J14.2@97.79,113.03 97.79,106.68 J16.1@104.14,100.33 ; J21.2@120.65,113.03 120.65,107.95 ; 125.73,100.33 120.65,105.41 120.65,107.95 ; J20.4@140.97,104.14 J20.3@143.51,104.14 140.335,107.315 121.285,107.315 120.65,107.95 ; 51.117,103.188 52.07,104.14 ; 51.117,103.188 51.117,104.14 ; 51.117,104.14 52.07,104.14 ; 51.117,104.14 51.117,105.727 52.07,106.68 ; 52.07,104.14 52.07,106.68
  Bottom Layer w3: 52.07,106.68 52.102,106.712 74.93,106.712 75.533,106.712 ; 74.93,107.315 75.533,106.712 ; 120.65,107.95 119.412,106.712 97.822,106.712 97.79,106.68 97.758,106.712 75.533,106.712
  Bottom Layer w5: J9.2@81.28,60.96 88.9,53.34 ; 92.71,101.6 97.79,106.68 ; 117.475,53.34 J3.2@130.81,53.34
  other v1: 33.655,31.115 88.9,36.195 102.87,36.195 102.87,42.545 125.095,43.815 125.095,52.705 135.89,57.15 115.57,63.5 123.825,68.58 153.67,68.58 153.67,78.105 153.67,81.28 28.575,101.6 42.545,103.505 47.625,103.505 52.07,103.505 57.15,103.505 70.485,103.505 74.93,103.505 79.375,103.505 93.98,103.505 99.06,103.505 111.125,103.505 120.65,103.505 124.46,103.505 28.575,106.045 57.15,107.95 79.375,107.95 100.965,107.95 111.125,107.95 28.575,110.49
  other v5: 75.184,56.134 75.184,60.452 73.914,68.072 59.182,71.628 61.214,71.628